# Altium PCB QFN-88.pcbdoc
Units mm, origin at the board's own origin, x right, y up, seen from the top; angles counter-clockwise.
Board outline 39.87 x 36.95 mm, 2 copper layers (Top Layer, Bottom Layer); 1 components, 0 nets, 89 pads, 1 vias.
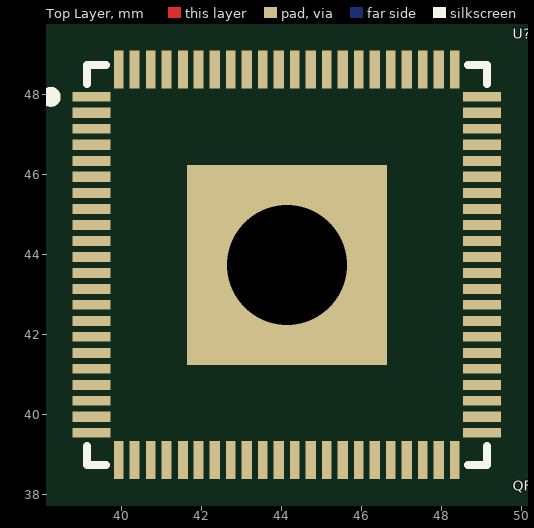
[diagram p0: Top Layer view]
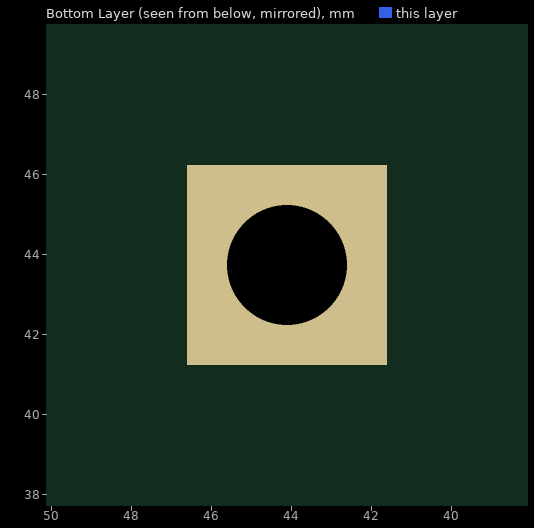
[diagram p1: Bottom Layer view, seen from below]

## Layer stack, top to bottom
Top Layer: signal copper (thickness not stored)
Dielectric: dielectric 0.32, FR-4, Dk 4.8
Bottom Layer: signal copper (thickness not stored)

## Board outline
65.269,25.4 25.4,25.4 25.4,62.353 65.269,62.353

## Components (designator, comment, footprint, x,y, rotation, side; value= is the part's Value field where it differs from the comment)
U? "QFN-88_10.0X10.0XP04MM" QFN-88_10.0X10.0XP04MM 43.937,43.749 r0 top

## Footprints (in the part's own frame and the unit in brackets; to place one, negate y for a bottom-side part, rotate by r counter-clockwise, add the part's x,y. Pads: shape width x height; smd on the part's side, far side on the other; paste and mask are expansions set on the pad)
QFN-88_10.0X10.0XP04MM [mm]
  rect 0.95x0.249 smd: 1(-4.687,4.2) 3(-4.687,3.4) 5(-4.687,2.6) 7(-4.687,1.8) 9(-4.687,0.999) 11(-4.687,0.199) 13(-4.687,-0.601) 14(-4.687,-0.999) 15(-4.687,-1.401) 16(-4.687,-1.8) 17(-4.687,-2.201) 18(-4.687,-2.6) 19(-4.687,-3.001) 20(-4.687,-3.4) 22(-4.687,-4.2) 45(5.064,-4.2) 47(5.064,-3.4) 48(5.064,-3.001) 49(5.064,-2.6) 50(5.064,-2.201) 51(5.064,-1.8) 52(5.064,-1.401) 53(5.064,-0.999) 54(5.064,-0.601) 56(5.064,0.199) 58(5.064,0.999) 60(5.064,1.8) 62(5.064,2.6) 64(5.064,3.4) 66(5.064,4.2)
  rect 0.95x0.251 smd: 2(-4.687,3.8) 4(-4.687,3) 6(-4.687,2.2) 8(-4.687,1.4) 10(-4.687,0.599) 12(-4.687,-0.201) 21(-4.687,-3.8) 46(5.064,-3.8) 55(5.064,-0.201) 57(5.064,0.599) 59(5.064,1.4) 61(5.064,2.2) 63(5.064,3) 65(5.064,3.8)
  rect 0.249x0.95 smd: 23(-4.012,-4.876) 24(-3.613,-4.876) 25(-3.212,-4.876) 26(-2.813,-4.876) 27(-2.412,-4.876) 28(-2.013,-4.876) 30(-1.213,-4.876) 32(-0.413,-4.876) 34(0.387,-4.876) 36(1.188,-4.876) 38(1.988,-4.876) 40(2.788,-4.876) 42(3.588,-4.876) 44(4.388,-4.876) 67(4.388,4.876) 69(3.588,4.876) 71(2.788,4.876) 73(1.988,4.876) 75(1.188,4.876) 77(0.387,4.876) 79(-0.413,4.876) 81(-1.213,4.876) 83(-2.013,4.876) 84(-2.412,4.876) 85(-2.813,4.876) 86(-3.212,4.876) 87(-3.613,4.876) 88(-4.012,4.876)
  rect 0.251x0.95 smd: 29(-1.613,-4.876) 31(-0.813,-4.876) 33(-0.013,-4.876) 35(0.787,-4.876) 37(1.588,-4.876) 39(2.388,-4.876) 41(3.188,-4.876) 43(3.988,-4.876) 68(3.988,4.876) 70(3.188,4.876) 72(2.388,4.876) 74(1.588,4.876) 76(0.787,4.876) 78(-0.013,4.876) 80(-0.813,4.876) 82(-1.613,4.876)
  rect 5x5 hole 3: 89(0.188,0)
  silkscreen extent -5.84,-5 5.19,5

## Via types
v1: diameter 0.66, hole 0.33, Top Layer to Bottom Layer, 1 vias

## Nets (pads, with @x,y where several pads share a name; then routed paths per layer and width w, separated by ;. In a path a pad name is that pad's centre, name@x,y a point inside that pad or via, vN(x,y) a via of type N, cw(c..) or ccw(c..) an arc to the next point about the centre after c; other vN are vias at no path point)
pads on no net: U?.1 U?.2 U?.3 U?.4 U?.5 U?.6 U?.7 U?.8 U?.9 U?.10 U?.11 U?.12 U?.13 U?.14 U?.15 U?.16 U?.17 U?.18 U?.19 U?.20 U?.21 U?.22 U?.23 U?.24 U?.25 U?.26 U?.27 U?.28 U?.29 U?.30 U?.31 U?.32 U?.33 U?.34 U?.35 U?.36 U?.37 U?.38 U?.39 U?.40 U?.41 U?.42 U?.43 U?.44 U?.45 U?.46 U?.47 U?.48 U?.49 U?.50 U?.51 U?.52 U?.53 U?.54 U?.55 U?.56 U?.57 U?.58 U?.59 U?.60 U?.61 U?.62 U?.63 U?.64 U?.65 U?.66 U?.67 U?.68 U?.69 U?.70 U?.71 U?.72 U?.73 U?.74 U?.75 U?.76 U?.77 U?.78 U?.79 U?.80 U?.81 U?.82 U?.83 U?.84 U?.85 U?.86 U?.87 U?.88 U?.89
copper on no net:
  other v1: 44.124,43.748

## Silkscreen, mask and mechanical layers (free items; w line width, h text height)
Document:
  lines w0.003: 45.309,43.851 45.36,43.902